# Altium PCB PCB_CONCENTRADOR.PcbDoc (part 1 of 3)
Units mm, origin at the board's own origin, x right, y up, seen from the top; angles counter-clockwise.
Board outline 90 x 100 mm, 2 copper layers (Top Layer, Bottom Layer); 69 components, 66 nets, 271 pads, 23 vias.
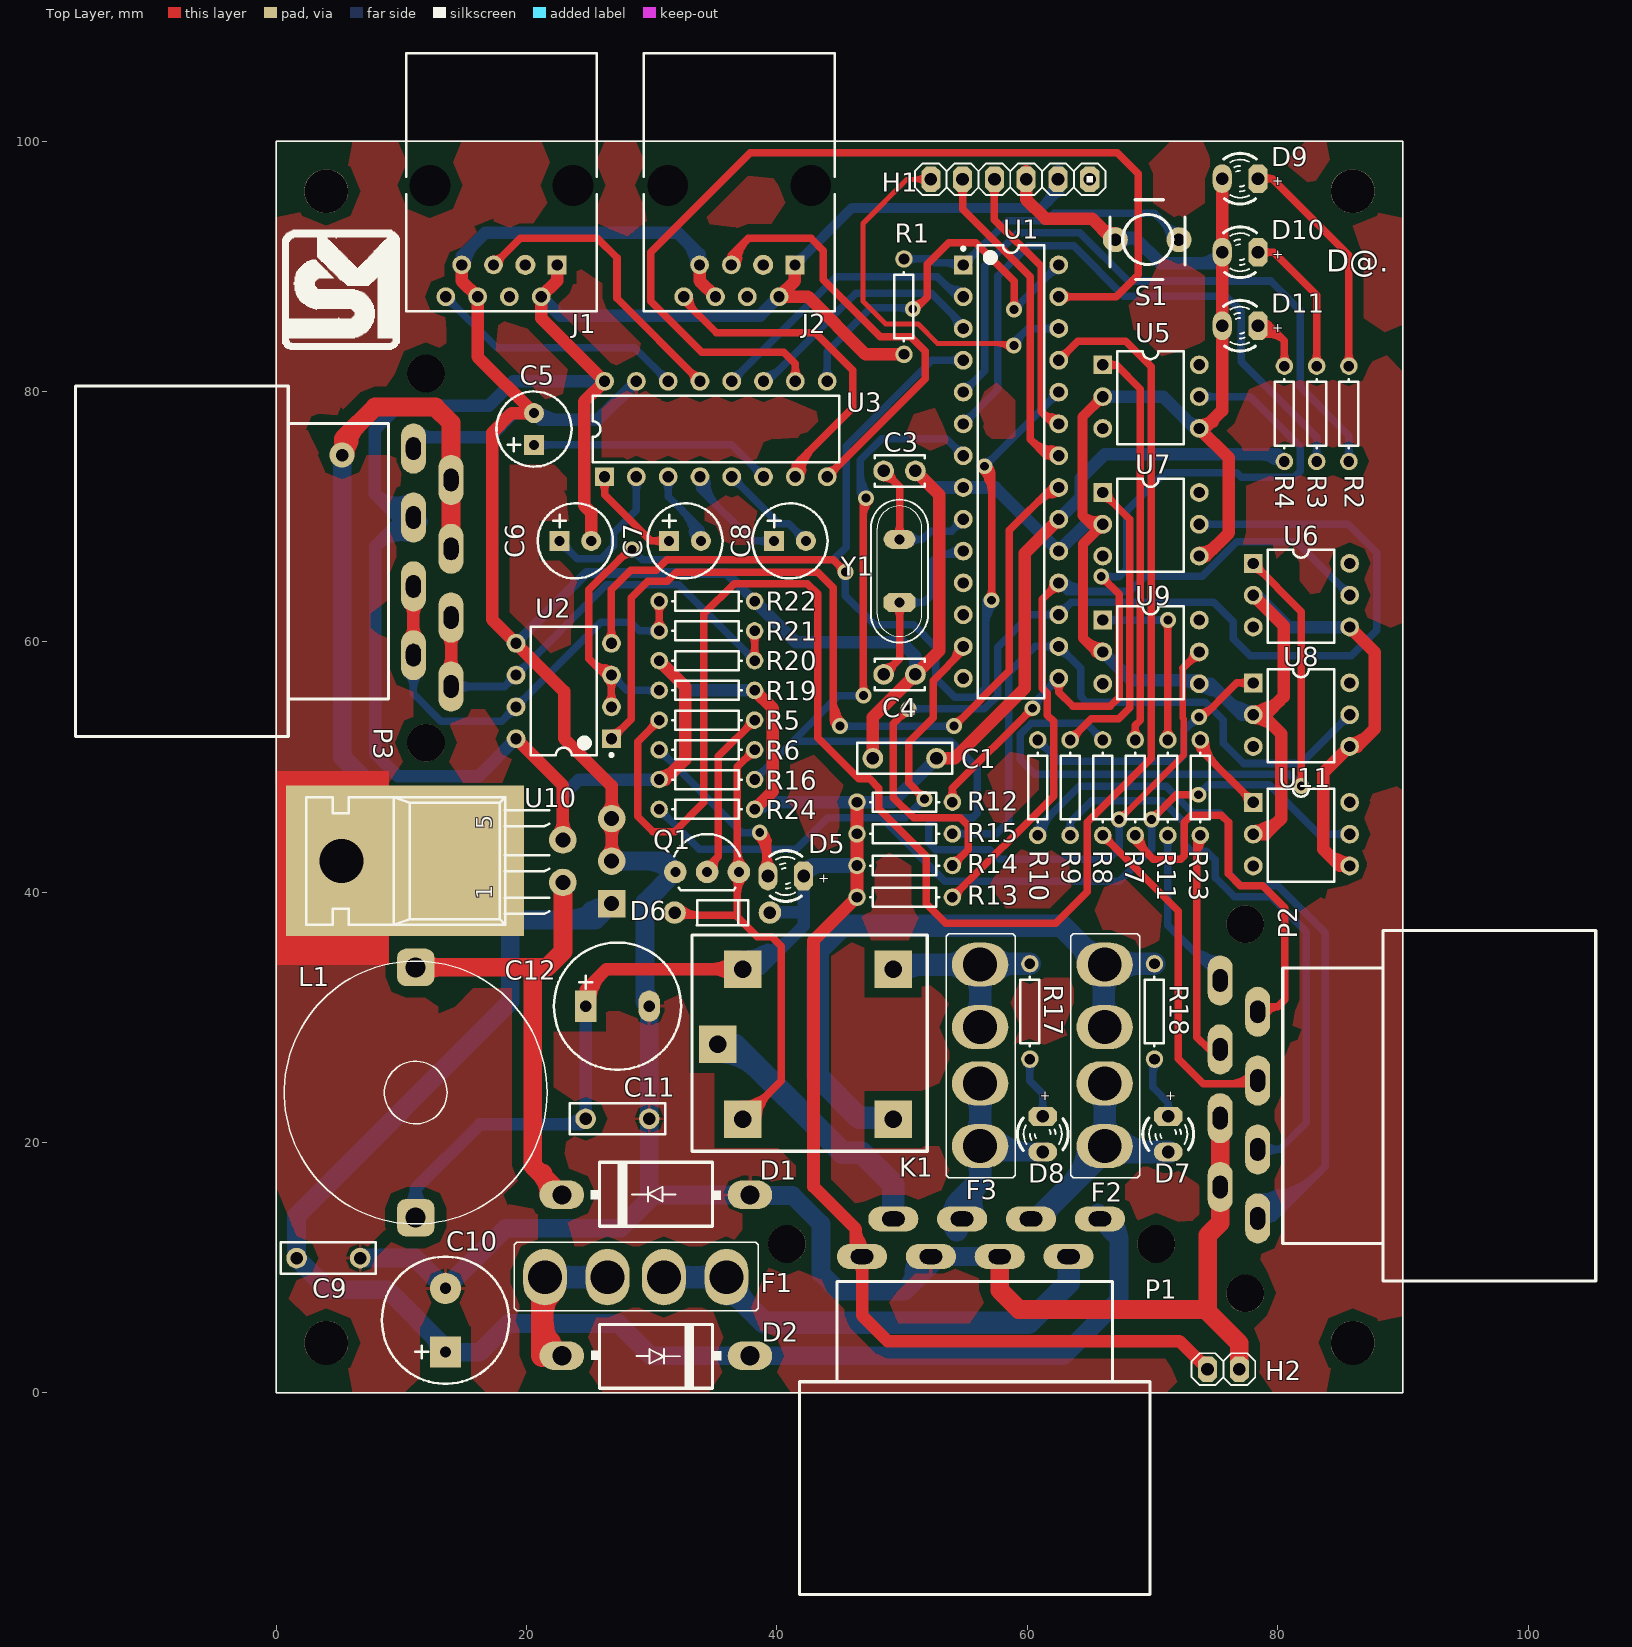
[diagram p0: Top Layer view]
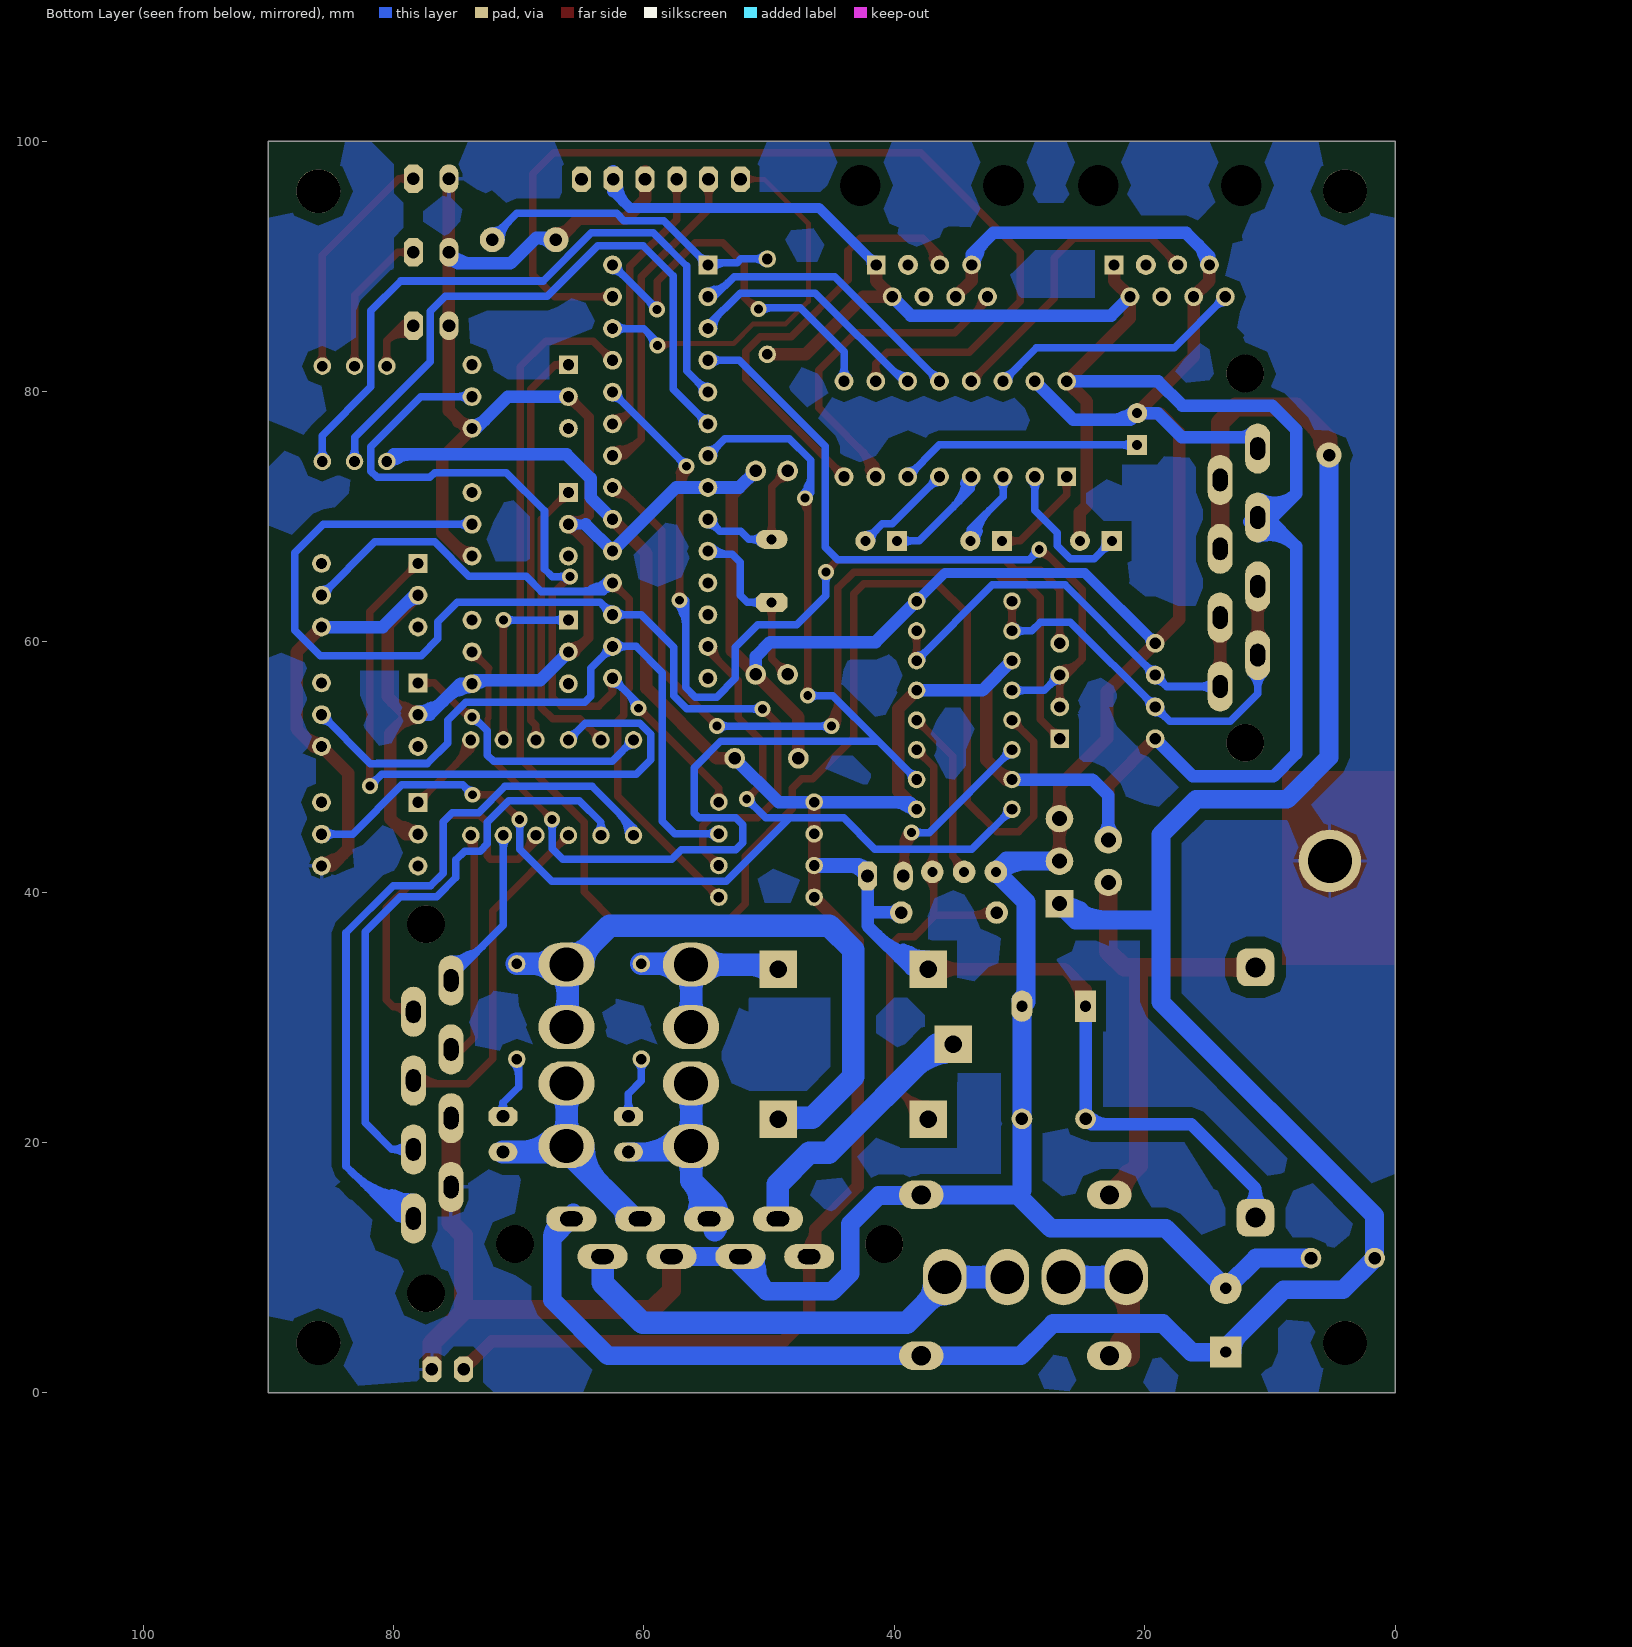
[diagram p1: Bottom Layer view, seen from below]

## Layer stack, top to bottom
Top Solder: solder mask 0.0102, Solder Resist, Dk 3.5
Top Layer: signal copper 0.0356
Dielectric 1: dielectric 0.32, FR-4, Dk 4.8
Bottom Layer: signal copper 0.0356
Bottom Solder: solder mask 0.0102, Solder Resist, Dk 3.5

## Board outline
0,0 0,100 90,100 90,0

## Design rules (kind name [scope] priority, off if disabled: settings)
Clearance "Poligono botton" [(InNamedPolygon('poligono gnd botton'))] p1: gap=0.8
Clearance "Pligono top" [(InNamedPolygon('poligono gnd top'))] p2: gap=0.8
Clearance [All] p3: gap=0.254
PolygonConnect [All] p1: connectstyle=Relief reliefconductorwidth=0.254 reliefentries=4 polygonreliefangle="90 Angle" airgapwidth=0.254
RoomDefinition concentrador [InComponentClass('concentrador')] p1: confinementstyle=ConfineIn formatcopy=TRUE lockcomponents=FALSE outline 0,0 90,0 90,100 0,100
RoutingVias [All] p1: holewidth=0.711 width=1.27 viastyle="Through Hole" minholewidth=0.711 minwidth=1.27 maxholewidth=0.711 maxwidth=1.27
SolderMaskExpansion [All] p1: expansion=0.102
Width "Schematic Width Constraint_10" [InNet('NetD2_1')] p1: maxlimit=2.5 minlimit=1.5 preferedwidth=1.8
Width "Schematic Width Constraint_9" [InNet('RELE1NO')] p2: maxlimit=2.5 minlimit=1.5 preferedwidth=1.8
Width "Schematic Width Constraint_8" [InNet('RELE1NC')] p3: maxlimit=2.5 minlimit=1.5 preferedwidth=1.8
Width "Schematic Width Constraint_7" [InNet('RELE1C')] p4: maxlimit=2.5 minlimit=1.5 preferedwidth=1.8
Width "Schematic Width Constraint_6" [InNet('NetD7_2')] p5: maxlimit=2.5 minlimit=1.5 preferedwidth=1.8
Width "Schematic Width Constraint_5" [InNet('NetD8_2')] p6: maxlimit=2.5 minlimit=1.5 preferedwidth=1.8
Width "Schematic Width Constraint_4" [InNet('GND')] p7: maxlimit=1.5 minlimit=0.8 preferedwidth=1
Width "Schematic Width Constraint_3" [InNet('5VCC')] p8: maxlimit=1.5 minlimit=0.8 preferedwidth=1
Width "Schematic Width Constraint_1" [InNet('NetD1_2')] p9: maxlimit=2.5 minlimit=1.5 preferedwidth=1.8
Width "Schematic Width Constraint" [InNet('24VCC')] p10: maxlimit=2.5 minlimit=1.5 preferedwidth=1.5
Width "Schematic Width Constraint_2" [InNet('24VCC_IN')] p11: maxlimit=2.5 minlimit=1.5 preferedwidth=1.8
Width [All] p12: maxlimit=0.8 minlimit=0.4 preferedwidth=0.6
30 further rules are at their usual default settings.

## Components (designator, comment, footprint, x,y, rotation, side; value= is the part's Value field where it differs from the comment)
C1 "VP44BY224JB" VP44-2.5 50.21,50.7 r180 top
C3 "VP31BA220JB" VP31-2.5 49.799,73.649 r0 top
C4 "VP31BA220JB" VP31-2.5 49.799,57.393 r0 top
C5 "Cap2" C1UF 20.599,75.73 r90 top
C6 "Cap2" C1UF 22.631,68.061 r0 top
C7 "Cap2" C1UF 31.394,68.061 r0 top
C8 "Cap2" C1UF 39.776,68.061 r0 top
C9 "VP44BY224JB" VP44-2.5 4.175,10.775 r0 top
C10 "Cap Pol1" C1000UF#1 13.525,3.275 r90 top
C11 "VP44BY224JB" VP44-2.5 27.265,21.9 r180 top
C12 "Cap Pol1" C1000UF#2 24.725,30.9 r0 top
D1 "Diodo" 1N4000 22.825,15.825 r0 top
D2 "Diodo" 1N4000 37.85,2.975 r180 top
D5 "LED0" "LED3MM green" 40.71,41.3 r0 top
D6 "Diode 1N4001" DIODE-0.3A 31.825,38.375 r0 top
D7 "LED0" "LED3MM green" 71.26,20.675 r90 top
D8 "LED0" "LED3MM green" 61.235,20.675 r90 top
D9 "LED0" "LED3MM green" 77,97 r0 top
D10 "LED0" "LED3MM green" 77,91.125 r0 top
D11 "LED0" "LED3MM green" 77,85.25 r0 top
F1 "Fuse" PORTA_FUSE 28.725,9.25 r0 top
F2 "Fuse" PORTA_FUSE 66.185,26.975 r270 top
F3 "Fuse" PORTA_FUSE 56.235,26.975 r270 top
H1 "Header 6" "Header 1X6" 57.375,96.95 r0 top
H2 "Header" "Header 1X2" 74.4,1.9 r0 top
J1 "RJ45" 15-43-6233 18,107 r180 top
J2 "RJ45" 15-43-6233 37,107 r180 top
K1 "Relay-SPDT" RELE 37.285,21.854 r0 top
L1 "Inductor Adj" Inductor_redondo 11.15,24 r270 top
P1 "MHDR1X8" 8PEQ_TAIYUE_OK 54.3,12.4 r0 top
P2 "MHDR1X8" 8PEQ_TAIYUE_OK 76.91,21.45 r90 top
P3 "MHDR1X8" 8PEQ_TAIYUE_OK 12.471,67.934 r270 top
Q1 "2N3904" 2N3904_OK 34.425,41.625 r90 top
R1 "Res1" AXIAL-0.3 50.15,86.775 r90 top
R2 "Res1" AXIAL-0.3 85.693,78.219 r90 top
R3 "Res1" AXIAL-0.3 83.117,78.219 r90 top
R4 "Res1" AXIAL-0.3 80.541,78.219 r90 top
R5 "Res1" AXIAL-0.3 34.41,53.75 r0 top
R6 "Res1" AXIAL-0.3 34.41,51.375 r180 top
R7 "Res1" AXIAL-0.3 68.628,48.355 r270 top
R8 "Res1" AXIAL-0.3 66.03,48.355 r270 top
R9 "Res1" AXIAL-0.3 63.431,48.355 r270 top
R10 "Res1" AXIAL-0.3 60.833,48.355 r270 top
R11 "Res1" AXIAL-0.3 71.227,48.355 r270 top
R12 "Res1" AXIAL-0.3 50.21,47.2 r0 top
R13 "Res1" AXIAL-0.3 50.21,39.6 r0 top
R14 "Res1" AXIAL-0.3 50.21,42.133 r0 top
R15 "Res1" AXIAL-0.3 50.21,44.667 r0 top
R16 "Res1" AXIAL-0.3 34.41,49 r0 top
R17 "Res1" AXIAL-0.3 60.21,30.475 r270 top
R18 "Res1" AXIAL-0.3 70.16,30.475 r270 top
R19 "Res1" AXIAL-0.3 34.41,56.125 r0 top
R20 "Res1" AXIAL-0.3 34.41,58.5 r0 top
R21 "Res1" AXIAL-0.3 34.41,60.875 r180 top
R22 "Res1" AXIAL-0.3 34.41,63.25 r0 top
R23 "Res1" AXIAL-0.3 73.825,48.355 r270 top
R24 "Res1" AXIAL-0.3 34.41,46.625 r180 top
S1 "Push Button" PULSA4 69.575,92.125 r0 top
U1 "PIC18F2550-I/SP" SPDIP300-SP28 58.7,73.6 r0 top
U2 "MAX485CPA" PA8 22.975,56.075 r180 top
U3 "MAX232N" N016 35.125,77 r0 top
U5 "4N33" 4n35_4n33_6pines 69.75,79.5 r270 top
U6 "4N33" 4n35_4n33_6pines 81.765,63.636 r270 top
U7 "4N33" 4n35_4n33_6pines 69.75,69.305 r270 top
U8 "4N33" 4n35_4n33_6pines 81.765,54.093 r270 top
U9 "4N33" 4n35_4n33_6pines 69.75,59.109 r270 top
U10 "LM2596T-5.0" FP_LM2596_D_PCB 5.21,42.5 r90 top
U11 "4N33" 4n35_4n33_6pines 81.765,44.55 r270 top
Y1 "XTAL" "Cristal mini" 49.799,65.648 r90 top

## Footprints (in the part's own frame and the unit in brackets; to place one, negate y for a bottom-side part, rotate by r counter-clockwise, add the part's x,y. Pads: shape width x height; smd on the part's side, far side on the other; paste and mask are expansions set on the pad)
1N4000 [mil] "Diodo Rectificador de proposito general"
  oval 140x90 hole 60: 1(591.54,0) 2(0,0)
  silkscreen extent 90,-98 500,102, body extent -27,-102 615,106, height 183
2N3904_OK [mm]
  round 1.8 hole 0.8: 1(0,2.54) 2(0,0) 3(0,-2.54)
  silkscreen extent -1.48,-2.61 3.02,2.61
4n35_4n33_6pines [mm] "optoacoplador"
  rect 1.5x1.5 hole 0.9: 1(-2.628,-3.717)
  round 1.5 hole 0.9: 2(-0.088,-3.717) 3(2.452,-3.717) 6(-2.628,3.988) 7(-0.088,3.988) 8(2.452,3.988)
  silkscreen extent -3.72,-2.55 3.7,2.75
8PEQ_TAIYUE_OK [mm]
  round 3 hole 3: 1(-13.5,-0.5) 1(16,-0.5)
  oval 4x2 hole 1.2 slot 1.8 at 0 deg: 1(-5,1.5) 2(0.5,1.5) 3(6,1.5) 4(11.5,1.5) 5(-7.5,-1.5) 6(-2,-1.5) 7(3.5,-1.5) 8(9,-1.5)
  silkscreen extent -12.5,-28.5 15.5,-3.5
15-43-6233 [mm] "Connector; PCB Jack, Thru-Hole; 1-Port; Unshielded without Lightpipes; Right Angle"
  rect 1.5x1.5 hole 0.9: 1(-4.445,16.89)
  round 1.5 hole 0.9: 2(-3.175,19.43) 4(-0.635,19.43) 5(0.635,16.89) 6(1.905,19.43) 7(3.175,16.89) 8(4.445,19.43)
  round 1.6 hole 0.9: 3(-1.905,16.89)
  round 2.95 hole 3.25 unplated: MH1(-5.715,10.54) MH2(5.715,10.54)
  silkscreen extent -7.62,0 7.62,20.58
AXIAL-0.3 [mm] "Axial Device, Thru-Hole; 2 Leads; 0.3 in Pin Spacing"
  round 1.4 hole 0.85: 1(-3.81,0) 2(3.81,0)
  silkscreen extent -2.77,-0.76 2.77,0.76
C1UF [mm]
  rect 1.6x1.6 hole 0.8: 1(0,0)
  round 1.6 hole 0.8: 2(2.54,0)
  silkscreen extent -1.73,-3 4.27,3
C1000UF#1 [mm]
  rect 2.5x2.5 hole 0.9: 1(0,0)
  round 2.5 hole 0.9: 2(5.08,0)
  silkscreen extent -2.54,-5.08 7.62,5.08
C1000UF#2 [mm]
  rect 1.7x2.5 hole 0.9: 1(0,0)
  oval 1.7x2.5 hole 0.9: 2(5.08,0)
  silkscreen extent -2.54,-5.08 7.62,5.08
"Cristal mini" [mm] "Cristal de cuarzo empaque pequeño"
  oct 1.524x2.54 hole 0.8: 1(-2.5,0)
  oval 1.524x2.54 hole 0.8: 2(2.54,0)
  silkscreen extent -5.71,-2.29 5.71,2.29, body extent -5.63,-2.35 5.72,2.3, height 3.5
DIODE-0.3A [mm]
  round 1.8 hole 1: 1(0,0) 2(7.62,0)
  silkscreen extent 1.79,-1 5.9,1
FP_LM2596_D_PCB [mm] "Fotprint LM2596 disipa calor en el PCB"
  round 5 hole 3.5: 0(0,0)
  rect 12x19 smd: 0(0.008,-5.089)
  rect 2.2x2.2 hole 1.2: 1(-3.416,-21.597)
  round 2.2 hole 1.2: 2(-1.716,-17.697) 3(-0.016,-21.597) 4(1.684,-17.697) 5(3.384,-21.597)
  silkscreen extent -5.08,-16.62 5.08,2.79
"Header 1X2" [mil] "Conector Header 1 linea 2 terminales"
  oct 60x80 hole 40: 1(0,0) 2(100,0)
  silkscreen extent -50,-50 150,50, body extent -50,-49 150,49, height 341
"Header 1X6" [mil] "Conector Header 1 linea 6 terminales"
  oct 60x80 hole 40: 1(-200,0) 2(-100,0) 3(0,0) 4(100,0) 5(200,0) 6(300,0)
  silkscreen extent -250,-50 350,50, body extent -250,-48 350,50, height 344
Inductor_redondo [mm]
  rrect50% 3x3 hole 1.6: 1(10,0) 2(-10,0)
  silkscreen extent -10.5,-10.5 10.5,10.5
"LED3MM green" [mil] "Led de 3mm Verde"
  oct 60x90.55 hole 40: 1(56.1,0)
  oval 60x90.55 hole 40: 2(-56.1,0)
  silkscreen extent -51,-80 51,80, body extent -65,-62 65,67, height 217
N016 [mm] "DIP; 16 Leads; Row Spacing 7.62 mm; Pitch 2.54 mm"
  rect 1.5x1.5 hole 0.9: 1(-8.89,-3.81)
  round 1.5 hole 0.9: 2(-6.35,-3.81) 3(-3.81,-3.81) 4(-1.27,-3.81) 5(1.27,-3.81) 6(3.81,-3.81) 7(6.35,-3.81) 8(8.89,-3.81) 9(8.89,3.81) 10(6.35,3.81) 11(3.81,3.81) 12(1.27,3.81) 13(-1.27,3.81) 14(-3.81,3.81) 15(-6.35,3.81) 16(-8.89,3.81)
  silkscreen extent -9.85,-2.65 9.85,2.65
PA8 [mm] "DIP, 8-Leads, Row Spacing 7.62mm, Pitch 2.54mm, Body 9.38x7.24mm"
  rect 1.5x1.5 hole 0.9: 1(-3.81,3.81)
  round 1.5 hole 0.9: 2(-3.81,1.27) 3(-3.81,-1.27) 4(-3.81,-3.81) 5(3.81,-3.81) 6(3.81,-1.27) 7(3.81,1.27) 8(3.81,3.81)
  silkscreen extent -3.94,-5.15 2.65,5.23, body extent -3.6,-5.15 3.6,5.15, height 4.58
PORTA_FUSE [mm]
  oval 3.5x4.5 hole 2.7: 1(-7.25,0) 1(-2.25,0) 2(2.25,0) 2(7.25,0)
  silkscreen extent -9.7,-2.7 9.8,2.8
PULSA4 [mm]
  round 2 hole 1: 1(-2.54,0) 2(2.54,0)
  silkscreen extent -2.97,-3.18 3.03,3.19
RELE [mm]
  rect 3x3 hole 1.4: 1(-2,6) 2(12,12) 3(12,0) 4(0,12) 5(0,0)
  silkscreen extent -4.06,-2.54 14.73,14.73
SPDIP300-SP28 [mm] "DIP, 28-Leads, Row Spacing 7.62mm, Pitch 2.54mm, Body 34.9x6.8mm"
  rect 1.5x1.5 hole 0.9: 1(-3.81,16.51)
  round 1.5 hole 0.9: 2(-3.81,13.97) 3(-3.81,11.43) 4(-3.81,8.89) 5(-3.81,6.35) 6(-3.81,3.81) 7(-3.81,1.27) 8(-3.81,-1.27) 9(-3.81,-3.81) 10(-3.81,-6.35) 11(-3.81,-8.89) 12(-3.81,-11.43) 13(-3.81,-13.97) 14(-3.81,-16.51) 15(3.81,-16.51) 16(3.81,-13.97) 17(3.81,-11.43) 18(3.81,-8.89) 19(3.81,-6.35) 20(3.81,-3.81) 21(3.81,-1.27) 22(3.81,1.27) 23(3.81,3.81) 24(3.81,6.35) 25(3.81,8.89) 26(3.81,11.43) 27(3.81,13.97) 28(3.81,16.51)
  silkscreen extent -3.93,-18.1 2.65,18.1, body extent -3.55,-18.1 3.55,18.1, height 5.08
VP31-2.5 [mm] "Capacitor, Ceramic, Thru-Hole, Dipped Radial; Body 4 x 2.5 mm (WxT) Pin Spacing 2.54 mm (typ)"
  round 1.65 hole 1: 1(-1.27,0) 2(1.27,0)
  silkscreen extent -2,-1.25 2,1.25
VP44-2.5 [mm] "Capacitor, Ceramic, Thru-Hole, Dipped Radial; Body 7.6 x 2.5 mm (WxT) Pin Spacing 5.08 mm (typ)"
  round 1.65 hole 1: 1(-2.54,0) 2(2.54,0)
  silkscreen extent -3.8,-1.25 3.8,1.25

## Part data
C1 C9 C11: "Dipped Radial Multilayer Ceramic Capacitor X7R: 220nF, 100V"
C3 C4: "Dipped Radial Multilayer Ceramic Capacitor COG (NPO): 22pF, 100V"
C5 C6 C7 C8: "Capacitor"
C10 C12: "Polarized Capacitor (Radial)"
D1 D2: "Diodo rectificador"
D5 D7 D8 D9 D10 D11: "Typical INFRARED GaAs LED"
D6: "1 Amp General Purpose Rectifier"
F1 F2 F3: library part "Fuse 1"
H1: "Header, 6-Pin"
H2: library part "Header 2", "Header 2 pin"
J1 J2: library part 15-43-6233, "Right Angle, Standard Profile, RJ45-Keyed, Flange Mount PCB Jack"
K1: "Single-Pole Dual-Throw Relay"
L1: "Adjustable Inductor"
P1 P2 P3: "Header, 8-Pin"
Q1: "NPN General Purpose Amplifier"
R1 R2 R3 R4 R5 R6 R7 R8 R9 R10 R11 R12 R13 R14 R15 R16 R17 R18 R19 R20 R21 R22 R23 R24: "Resistor"
S1: "Switch"
U1: "High Performance, Enhanced Flash, USB Microcontroller with nanoWatt Technology, 32K Flash, 28-Pin SPDIP, Industrial Temperature Range"
U2: "Low-Power, Slew-Rate-Limited RS-485/RS-422 Transceiver"
U3: "Dual EIA-232 Driver/Receiver"
U5 U6 U7 U8 U9 U11: library part ILD74, "Optocoupler, Phototransistor Output, Dual Channel, TTL Compatible, Pb-free"
U10: "SIMPLE SWITCHER Power Converter 150 KHz 3A Step-Down Voltage Regulator"
Y1: library part "Cristal de cuarzo", "Cristal de cuarzo"

## Free pads (board coordinates)
  round 3.5 hole 3.5: 0(4,4) 0(4,96) 0(86,4) 0(86,96)

## Via types
v1: diameter 1.27, hole 0.711, Top Layer to Bottom Layer, 22 vias
v2: diameter 2, hole 1, Top Layer to Bottom Layer, 1 vias

## Nets (pads, with @x,y where several pads share a name; then routed paths per layer and width w, separated by ;. In a path a pad name is that pad's centre, name@x,y a point inside that pad or via, vN(x,y) a via of type N, cw(c..) or ccw(c..) an arc to the next point about the centre after c; other vN are vias at no path point)
5VCC: C1.1 C6.2 C11.2 C12.1 D5.1 D6.2 H1.5 H2.1 J1.1 J1.2 J2.1 J2.2 K1.4 L1.1 P1.5 P3.6 R1.1 R4.1 R12.1 R13.1 R14.1 R15.1 R16.1 R19.2 R20.1 R24.1 U1.20 U2.8 U3.16 U10.4 | length 569.4
  Top Layer w1: U2.8@19.165,52.265 22.907,48.523 U10.4@22.907,44.184 ; J1.1@22.445,90.11 22.445,88.84 J1.2@21.175,87.57 21.175,85.87 U3.16@26.235,80.81 24.612,79.187 24.612,70.901 25.171,70.342 C6.2@25.171,68.061 ; C12.1@24.55,31.603 ccw(c23.55,33.334) 25.481,32.817 ; C12.1@24.725,30.9 24.725,32.208 26.371,33.854 K1.4@37.285,33.854 ; R16.1@30.6,49 31.075,49 32.675,50.6 32.675,56.425 R20.1@30.6,58.5 ; R24.1@38.22,46.625 39.674,48.079 39.674,54.671 R19.2@38.22,56.125 ; J2.1@41.445,90.11 41.445,88.84 J2.2@40.175,87.57 42.48,87.57 47.085,82.965 R1.1@50.15,82.965 ; R12.1@46.4,47.2 R15.1@46.4,44.667 R14.1@46.4,42.133 R13.1@46.4,39.6 42.925,36.125 42.925,16.475 46.303,13.097 ; C1.1@52.75,50.7 54.2,50.7 59.8,56.3 59.8,67.08 U1.20@62.51,69.79 ; H2.1@74.4,1.9 72.15,4.15 48.85,4.15 46.8,6.2 P1.5@46.8,10.9 46.303,10.9 46.303,13.097 ; U10.4@22.483,44.608 ccw(c21.458,45.633) 22.907,45.633 ; U10.4@22.483,44.608 ccw(c21.458,45.633) 22.907,45.633 ; U10.4@22.483,44.608 ccw(c21.458,45.633) 22.907,45.633 ; 22.907,45.633 ccw(c24.356,45.633) U10.4@23.331,44.608 ; 22.907,45.633 ccw(c24.356,45.633) U10.4@23.331,44.608 ; 22.907,45.633 ccw(c24.356,45.633) U10.4@23.331,44.608 ; R16.1@30.6,49.2 ccw(c30.6,50.83) 31.752,49.677 ; R16.1@30.6,49.2 ccw(c30.6,50.83) 31.752,49.677 ; R16.1@30.6,49.2 ccw(c30.6,50.83) 31.752,49.677 ; R16.1@30.773,48.9 cw(c31.763,48.329) 31.467,49.432 ; R16.1@30.773,48.9 cw(c31.763,48.329) 31.467,49.432 ; R16.1@30.773,48.9 cw(c31.763,48.329) 31.467,49.432 ; 34.871,33.854 ccw(c34.871,36.268) 36.578,34.561 cw(c34.871,36.268) 34.871,33.854 ; 34.871,33.854 cw(c34.871,31.44) 36.578,33.147 ccw(c34.871,31.44) 34.871,33.854 ; 46.303,13.096 ccw(c48.722,13.096) P1.5@47.129,11.276 ; 46.303,13.096 ccw(c48.722,13.096) P1.5@47.129,11.276 ; 46.303,13.096 ccw(c48.722,13.096) P1.5@47.129,11.276 ; P1.5@46.446,10.546 cw(c45.593,9.693) 46.8,9.693 ; P1.5@46.446,10.546 cw(c45.593,9.693) 46.8,9.693 ; P1.5@46.446,10.546 cw(c45.593,9.693) 46.8,9.693 ; P1.5@46.451,11.258 ccw(c45.959,11.76) 46.543,12.151 ; P1.5@46.451,11.258 ccw(c45.959,11.76) 46.543,12.151 ; P1.5@46.451,11.258 ccw(c45.959,11.76) 46.543,12.151 ; 46.8,9.693 cw(c48.007,9.693) P1.5@47.154,10.546 ; 46.8,9.693 cw(c48.007,9.693) P1.5@47.154,10.546 ; 46.8,9.693 cw(c48.007,9.693) P1.5@47.154,10.546 ; 73.519,2.781 ccw(c74.4,3.662) H2.1@74.4,2.416 ; 73.519,2.781 ccw(c74.4,3.662) H2.1@74.4,2.416 ; 73.519,2.781 ccw(c74.4,3.662) H2.1@74.4,2.416 ; C12.1@25.075,31.3 cw(c28.112,31.3) 25.965,33.447 ccw(c28.112,31.3) C12.1@25.075,31.3
  Bottom Layer w0.8: J2.1@41.445,90.11 46.01,94.675 61.134,94.675 H1.5@62.455,95.996 ; 61.879,95.626 ccw(c61.21,96.294) H1.5@62.111,96.585 ; J2.1@41.445,90.46 ccw(c41.445,91.305) J2.1@42.042,90.708 ; J2.1@41.445,90.46 ccw(c41.445,91.305) J2.1@42.042,90.708 ; J2.1@41.445,90.46 ccw(c41.445,91.305) J2.1@42.042,90.708 ; J2.1@41.795,90.11 cw(c42.64,90.11) J2.1@42.042,90.708 ; J2.1@41.795,90.11 cw(c42.64,90.11) J2.1@42.042,90.708 ; J2.1@41.795,90.11 cw(c42.64,90.11) J2.1@42.042,90.708 ; 61.342,94.883 ccw(c59.53,96.696) H1.5@62.093,96.696 ; 61.342,94.883 ccw(c59.53,96.696) H1.5@62.093,96.696 ; 61.342,94.883 ccw(c59.53,96.696) H1.5@62.093,96.696 ; 61.673,95.127 cw(c63.67,94.592) H1.5@62.636,96.382 ; 61.673,95.127 cw(c63.67,94.592) H1.5@62.636,96.382 ; 61.673,95.127 cw(c63.67,94.592) H1.5@62.636,96.382
  Bottom Layer w1: P3.6@10.971,68.675 P3.6@10.971,69.934 P3.6@10.209,69.934 ; L1.1@11.15,14 11.15,16.325 ; U2.8@19.165,52.265 16.15,49.25 9.725,49.25 7.9,51.075 7.9,67.625 P3.6@10.209,69.934 ; J1.2@21.175,87.57 22.68,86.065 38.67,86.065 J2.2@40.175,87.57 ; 22.854,21.45 ccw(c22.854,23.771) C11.2@24.495,22.13 ; U10.4@22.907,44.184 22.907,47.727 24.18,49 R16.1@30.6,49 ; C12.1@24.725,30.9 C11.2@24.725,21.9 24.275,21.45 16.275,21.45 11.15,16.325 ; U3.16@26.235,80.81 18.925,80.81 16.99,78.875 9.825,78.875 7.875,76.925 7.875,71.85 ; R20.1@30.6,58.5 32.975,56.125 R19.2@38.22,56.125 ; K1.4@37.989,34.565 ccw(c38.704,35.287) 38.968,34.305 ccw(c39.231,33.322) K1.4@38.25,33.59 ; R24.1@38.22,46.625 38.795,47.2 R12.1@46.4,47.2 49.25,47.2 C1.1@52.75,50.7 ; K1.4@38.679,33.854 42.135,37.31 42.135,38.4 ; 39.288,35.391 ccw(c40.141,32.205) K1.4@37.285,33.854 ; D6.2@39.445,38.375 39.47,38.4 42.135,38.4 ; D5.1@42.135,41.3 42.135,38.4 ; H1.5@62.455,95.996 H1.5@62.455,97.6 ; U1.20@62.51,69.79 64.261,71.541 64.261,73.06 66.176,74.975 79.975,74.975 R4.1@80.541,74.409 ; 7.875,71.85 ccw(c9.637,73.612) P3.6@10.748,71.382 ; 7.875,71.85 ccw(c9.637,73.612) P3.6@10.748,71.382 ; 7.875,71.85 ccw(c9.637,73.612) P3.6@10.748,71.382 ; 7.875,71.85 9.791,69.934 ; 7.9,67.625 cw(c10.106,65.419) P3.6@10.852,68.449 ; 7.9,67.625 cw(c10.106,65.419) P3.6@10.852,68.449 ; 7.9,67.625 cw(c10.106,65.419) P3.6@10.852,68.449 ; 8.858,70.867 ccw(c10.29,72.3) P3.6@11.194,70.486 ; 8.858,70.867 ccw(c10.29,72.3) P3.6@11.194,70.486 ; 8.858,70.867 ccw(c10.29,72.3) P3.6@11.194,70.486 ; 9.154,68.879 cw(c10.602,67.432) P3.6@11.09,69.42 ; 9.154,68.879 cw(c10.602,67.432) P3.6@11.09,69.42 ; 9.154,68.879 cw(c10.602,67.432) P3.6@11.09,69.42 ; 9.791,69.934 cw(c9.791,68.792) P3.6@10.612,69.586 ; 9.791,69.934 ccw(c9.791,71.076) P3.6@10.612,70.282 ; 9.791,69.934 ccw(c9.791,71.076) P3.6@10.612,70.282 ; 9.791,69.934 cw(c9.791,68.792) P3.6@10.612,69.586 ; 9.791,69.934 ccw(c9.791,71.076) P3.6@10.612,70.282 ; 9.791,69.934 cw(c9.791,68.792) P3.6@10.612,69.586 ; 9.791,69.934 P3.6@10.209,69.934 ; 9.84,69.885 ccw(c10.944,70.988) P3.6@11.64,69.591 ; 9.84,69.885 ccw(c10.944,70.988) P3.6@11.64,69.591 ; 9.84,69.885 ccw(c10.944,70.988) P3.6@11.64,69.591 ; P3.6@10.409,70.134 cw(c11.097,69.446) P3.6@11.329,70.391 ; P3.6@10.409,70.134 cw(c11.097,69.446) P3.6@11.329,70.391 ; P3.6@10.409,70.134 cw(c11.097,69.446) P3.6@11.329,70.391 ; 11.15,16.325 ccw(c13.352,16.325) 11.838,14.726 cw(c13.352,16.325) 11.15,16.325 ; 11.15,16.325 cw(c8.948,16.325) 10.462,14.726 ccw(c8.948,16.325) 11.15,16.325 ; U10.4@22.483,44.608 ccw(c21.458,45.633) 22.907,45.633 ; U10.4@22.483,44.608 ccw(c21.458,45.633) 22.907,45.633 ; U10.4@22.483,44.608 ccw(c21.458,45.633) 22.907,45.633 ; 22.907,45.633 ccw(c24.356,45.633) U10.4@23.331,44.608 ; 22.907,45.633 ccw(c24.356,45.633) U10.4@23.331,44.608 ; 22.907,45.633 ccw(c24.356,45.633) U10.4@23.331,44.608 ; K1.4@37.285,33.854 ccw(c37.285,37.219) 39.665,34.84 cw(c37.285,37.219) K1.4@37.285,33.854 ; R24.1@38.272,46.818 ccw(c38.567,47.922) 39.139,46.932 ; R24.1@38.272,46.818 ccw(c38.567,47.922) 39.139,46.932 ; R24.1@38.272,46.818 ccw(c38.567,47.922) 39.139,46.932 ; R24.1@38.361,46.484 cw(c40.091,44.754) 40.091,47.2 ; R24.1@38.361,46.484 cw(c40.091,44.754) 40.091,47.2 ; R24.1@38.361,46.484 cw(c40.091,44.754) 40.091,47.2 ; 78.693,74.975 cw(c78.693,72.561) R4.1@80.4,74.268 ; 78.693,74.975 cw(c78.693,72.561) R4.1@80.4,74.268 ; 78.693,74.975 cw(c78.693,72.561) R4.1@80.4,74.268 ; 79.622,74.717 ccw(c80.194,75.706) R4.1@80.489,74.603 ; 79.622,74.717 ccw(c80.194,75.706) R4.1@80.489,74.603 ; 79.622,74.717 ccw(c80.194,75.706) R4.1@80.489,74.603 ; K1.4@37.285,34.854 ccw(c37.285,40.633) 41.372,36.547 cw(c37.285,40.633) K1.4@37.285,34.854 ; D6.2@39.728,38.092 cw(c40.471,37.349) 40.471,38.4 ccw(c40.471,37.349) D6.2@39.728,38.092 ; D6.2@39.728,38.658 ccw(c40.35,39.28) 40.35,38.4 cw(c40.35,39.28) D6.2@39.728,38.658
  Bottom Layer w1.2: D5.1@42.135,41.3 42.968,42.133 ; R14.1@46.4,42.133 42.968,42.133 ; D5.1@42.153,41.849 ccw(c42.266,42.835) 42.968,42.133 ; D5.1@42.153,41.849 ccw(c42.266,42.835) 42.968,42.133 ; D5.1@42.153,41.849 ccw(c42.266,42.835) 42.968,42.133 ; D5.1@42.177,41.844 ccw(c42.416,42.738) D5.1@42.879,41.937 ; D5.1@42.177,41.844 ccw(c42.416,42.738) D5.1@42.879,41.937 ; D5.1@42.177,41.844 ccw(c42.416,42.738) D5.1@42.879,41.937 ; D5.1@42.25,41.573 cw(c43.601,40.222) 43.601,42.133 ; D5.1@42.25,41.573 cw(c43.601,40.222) 43.601,42.133 ; D5.1@42.25,41.573 cw(c43.601,40.222) 43.601,42.133 ; D5.1@42.289,41.638 cw(c42.968,41.42) 42.968,42.133 ; D5.1@42.289,41.638 cw(c42.968,41.42) 42.968,42.133 ; D5.1@42.289,41.638 cw(c42.968,41.42) 42.968,42.133
24VCC: C9.1 C10.1 D2.2 P1.4 P3.1@13.971,72.934 P3.2 U10.1 | length 245.8
  Top Layer w1.5: v2@5.36,74.84 5.36,76.21 7.9,78.75 12.725,78.75 13.971,77.504 P3.1@13.971,72.934 P3.2@13.971,67.434 ; v2@5.15,75.142 ccw(c4.436,76.378) 5.815,76.009 ; v2@5.15,75.142 ccw(c4.436,76.378) 5.815,76.009 ; v2@5.15,75.142 ccw(c4.436,76.378) 5.815,76.009 ; v2@5.525,74.925 cw(c9.026,74.925) 6.55,77.4 ; v2@5.525,74.925 cw(c9.026,74.925) 6.55,77.4 ; v2@5.525,74.925 cw(c9.026,74.925) 6.55,77.4
  Bottom Layer w1.5: v2(5.275,74.925) 5.275,50.775 8.625,47.425 15.875,47.425 18.707,44.593 18.707,37.791 ; C10.1@13.25,3.25 16.255,3.25 18.555,5.55 27.326,5.55 29.901,2.975 62.875,2.975 67.325,7.425 67.325,12.375 ; C10.1@13.525,3.275 13.525,3.625 8.9,8.25 4.16,8.25 C9.1@1.635,10.775 1.635,14.16 18.707,31.232 18.707,37.791 ; 25.682,38.746 ccw(c25.682,39.66) U10.1@26.496,39.244 ; U10.1@26.807,39.084 25.514,37.791 18.707,37.791 ; P1.4@65.8,13.9 67.325,12.375 ; 22.841,37.791 ccw(c22.841,43.05) U10.1@26.56,39.331 ; 22.841,37.791 ccw(c22.841,43.05) U10.1@26.56,39.331 ; 22.841,37.791 ccw(c22.841,43.05) U10.1@26.56,39.331 ; 25.199,38.546 cw(c26.199,36.815) U10.1@26.716,38.746 ; 25.199,38.546 cw(c26.199,36.815) U10.1@26.716,38.746 ; 25.199,38.546 cw(c26.199,36.815) U10.1@26.716,38.746 ; P1.4@66.623,13.723 cw(c64.929,12.029) 67.325,12.029 ; P1.4@66.623,13.723 cw(c64.929,12.029) 67.325,12.029 ; P1.4@66.623,13.723 cw(c64.929,12.029) 67.325,12.029 ; P1.4@66.644,13.705 cw(c65.509,12.287) 67.325,12.287 ; P1.4@66.644,13.705 cw(c65.509,12.287) 67.325,12.287 ; P1.4@66.644,13.705 cw(c65.509,12.287) 67.325,12.287 ; P1.4@67.032,13.807 ccw(c68.263,13.313) 67.325,12.375 ; P1.4@67.032,13.807 ccw(c68.263,13.313) 67.325,12.375 ; P1.4@67.032,13.807 ccw(c68.263,13.313) 67.325,12.375 ; P1.4@67.041,13.832 ccw(c68.367,13.459) 67.174,12.77 ; P1.4@67.041,13.832 ccw(c68.367,13.459) 67.174,12.77 ; P1.4@67.041,13.832 ccw(c68.367,13.459) 67.174,12.77 ; 12.424,4.726 cw(c10.973,3.275) 13.025,3.275 ccw(c10.973,3.275) 12.424,4.726 ; C10.1@13.879,3.629 ccw(c14.792,4.542) 14.792,3.25 cw(c14.792,4.542) C10.1@13.879,3.629 ; P1.4@65.64,14.366 ccw(c65.97,14.233) 65.719,13.981 cw(c65.97,14.233) P1.4@65.64,14.366
24VCC_IN: F1.2 P1.8 | length 68
  Top Layer w1.5: F1.2@35.975,9.25 F1.2@36.675,9.25
  Bottom Layer w1.8: F1.2@30.975,9.25 F1.2@36.675,9.25 ; F1.2@35.975,9.25 35.975,8.65 39.025,5.6 60.1,5.6 63.3,8.8 P1.8@63.3,10.9 ; F1.2@31.576,8.649 cw(c33.027,7.198) 33.027,9.25 ; F1.2@31.576,8.649 cw(c33.027,7.198) 33.027,9.25 ; F1.2@31.576,8.649 cw(c33.027,7.198) 33.027,9.25 ; F1.2@31.576,9.851 ccw(c33.027,11.302) 33.027,9.25 ; F1.2@31.576,9.851 ccw(c33.027,11.302) 33.027,9.25 ; F1.2@31.576,9.851 ccw(c33.027,11.302) 33.027,9.25 ; 33.923,9.25 cw(c33.923,7.198) F1.2@35.374,8.649 ; 33.923,9.25 ccw(c33.923,11.302) F1.2@35.374,9.851 ; 33.923,9.25 ccw(c33.923,11.302) F1.2@35.374,9.851 ; 33.923,9.25 cw(c33.923,7.198) F1.2@35.374,8.649 ; 33.923,9.25 ccw(c33.923,11.302) F1.2@35.374,9.851 ; 33.923,9.25 cw(c33.923,7.198) F1.2@35.374,8.649 ; F1.2@35.975,7.9 cw(c35.975,6.089) 37.255,7.37 ; F1.2@35.975,7.9 cw(c35.975,6.089) 37.255,7.37 ; F1.2@35.975,7.9 cw(c35.975,6.089) 37.255,7.37 ; F1.2@36.825,8.75 ccw(c39.119,8.75) 37.497,7.128 ; F1.2@36.825,8.75 ccw(c39.119,8.75) 37.497,7.128 ; F1.2@36.825,8.75 ccw(c39.119,8.75) 37.497,7.128
A: P3.3 P3.4 R20.2 R21.1 U2.6 | length 79.7
  Top Layer w0.6: R20.2@38.22,58.5 R21.1@38.22,60.875 ; R21.1@37.937,60.592 cw(c37.254,59.909) 38.22,59.909 ; R21.1@37.937,60.592 cw(c37.254,59.909) 38.22,59.909 ; R21.1@37.937,60.592 cw(c37.254,59.909) 38.22,59.909 ; 38.22,59.466 ccw(c39.186,59.466) 38.503,58.783 cw(c39.186,59.466) 38.22,59.466 ; 38.22,59.466 cw(c37.254,59.466) 37.937,58.783 ccw(c37.254,59.466) 38.22,59.466 ; 38.22,59.909 cw(c39.186,59.909) R21.1@38.503,60.592 ; 38.22,59.909 cw(c39.186,59.909) R21.1@38.503,60.592 ; 38.22,59.909 cw(c39.186,59.909) R21.1@38.503,60.592
  Top Layer w1: P3.4@13.971,56.434 P3.3@13.971,61.934 ; P3.4@13.617,57.788 ccw(c12.764,58.641) 13.971,58.641 ; P3.4@13.617,57.788 ccw(c12.764,58.641) 13.971,58.641 ; P3.4@13.617,57.788 ccw(c12.764,58.641) 13.971,58.641 ; P3.3@13.617,60.58 cw(c12.764,59.727) 13.971,59.727 ; P3.3@13.617,60.58 cw(c12.764,59.727) 13.971,59.727 ; P3.3@13.617,60.58 cw(c12.764,59.727) 13.971,59.727 ; 13.971,58.641 ccw(c15.178,58.641) P3.4@14.325,57.788 ; 13.971,58.641 ccw(c15.178,58.641) P3.4@14.325,57.788 ; 13.971,58.641 ccw(c15.178,58.641) P3.4@14.325,57.788 ; 13.971,59.727 cw(c15.178,59.727) P3.3@14.325,60.58 ; 13.971,59.727 cw(c15.178,59.727) P3.3@14.325,60.58 ; 13.971,59.727 cw(c15.178,59.727) P3.3@14.325,60.58
  Bottom Layer w0.6: P3.4@13.971,56.434 18.254,56.434 U2.6@19.165,57.345 26.366,64.546 32.174,64.546 R20.2@38.22,58.5 ; P3.4@14.466,55.939 cw(c15.661,54.744) 15.661,56.434 ; P3.4@14.466,55.939 cw(c15.661,54.744) 15.661,56.434 ; P3.4@14.466,55.939 cw(c15.661,54.744) 15.661,56.434 ; P3.4@14.466,56.929 ccw(c15.661,58.124) 15.661,56.434 ; P3.4@14.466,56.929 ccw(c15.661,58.124) 15.661,56.434 ; P3.4@14.466,56.929 ccw(c15.661,58.124) 15.661,56.434 ; 18.397,56.577 cw(c19.165,55.809) U2.6@19.165,56.895 ; 18.397,56.577 ccw(c17.629,57.345) U2.6@18.715,57.345 ; 18.397,56.577 ccw(c17.629,57.345) U2.6@18.715,57.345 ; 18.397,56.577 cw(c19.165,55.809) U2.6@19.165,56.895 ; 18.397,56.577 ccw(c17.629,57.345) U2.6@18.715,57.345 ; 18.397,56.577 cw(c19.165,55.809) U2.6@19.165,56.895 ; U2.6@19.165,57.795 ccw(c19.165,58.881) 19.933,58.113 ; U2.6@19.165,57.795 ccw(c19.165,58.881) 19.933,58.113 ; U2.6@19.165,57.795 ccw(c19.165,58.881) 19.933,58.113 ; U2.6@19.615,57.345 cw(c20.701,57.345) 19.933,58.113 ; U2.6@19.615,57.345 cw(c20.701,57.345) 19.933,58.113 ; U2.6@19.615,57.345 cw(c20.701,57.345) 19.933,58.113 ; 37.537,59.183 cw(c36.854,58.5) R20.2@37.82,58.5 ; 37.537,59.183 ccw(c38.22,59.866) R20.2@38.22,58.9 ; 37.537,59.183 ccw(c38.22,59.866) R20.2@38.22,58.9 ; 37.537,59.183 cw(c36.854,58.5) R20.2@37.82,58.5 ; 37.537,59.183 ccw(c38.22,59.866) R20.2@38.22,58.9 ; 37.537,59.183 cw(c36.854,58.5) R20.2@37.82,58.5
B: P3.7 P3.8 R21.2 R22.1 U2.7 | length 78.3
  Top Layer w0.6: R21.2@30.6,60.875 R22.1@30.6,63.25 ; R21.2@30.317,61.158 ccw(c29.634,61.841) 30.6,61.841 ; R21.2@30.317,61.158 ccw(c29.634,61.841) 30.6,61.841 ; R21.2@30.317,61.158 ccw(c29.634,61.841) 30.6,61.841 ; R22.1@30.317,62.967 cw(c29.634,62.284) 30.6,62.284 ; R22.1@30.317,62.967 cw(c29.634,62.284) 30.6,62.284 ; R22.1@30.317,62.967 cw(c29.634,62.284) 30.6,62.284 ; 30.6,61.841 ccw(c31.566,61.841) R21.2@30.883,61.158 ; 30.6,61.841 ccw(c31.566,61.841) R21.2@30.883,61.158 ; 30.6,61.841 ccw(c31.566,61.841) R21.2@30.883,61.158 ; 30.6,62.284 cw(c31.566,62.284) R22.1@30.883,62.967 ; 30.6,62.284 cw(c31.566,62.284) R22.1@30.883,62.967 ; 30.6,62.284 cw(c31.566,62.284) R22.1@30.883,62.967
  Top Layer w1: P3.8@10.971,58.934 P3.7@10.971,64.434 ; P3.8@10.617,60.288 ccw(c9.764,61.141) 10.971,61.141 ; P3.8@10.617,60.288 ccw(c9.764,61.141) 10.971,61.141 ; P3.8@10.617,60.288 ccw(c9.764,61.141) 10.971,61.141 ; P3.7@10.617,63.08 cw(c9.764,62.227) 10.971,62.227 ; P3.7@10.617,63.08 cw(c9.764,62.227) 10.971,62.227 ; P3.7@10.617,63.08 cw(c9.764,62.227) 10.971,62.227 ; 10.971,61.141 ccw(c12.178,61.141) P3.8@11.325,60.288 ; 10.971,61.141 ccw(c12.178,61.141) P3.8@11.325,60.288 ; 10.971,61.141 ccw(c12.178,61.141) P3.8@11.325,60.288 ; 10.971,62.227 cw(c12.178,62.227) P3.7@11.325,63.08 ; 10.971,62.227 cw(c12.178,62.227) P3.7@11.325,63.08 ; 10.971,62.227 cw(c12.178,62.227) P3.7@11.325,63.08
  Bottom Layer w0.6: P3.8@10.971,58.934 10.971,55.839 13.16,53.65 18.01,53.65 U2.7@19.165,54.805 25.935,61.575 28.324,61.575 29.024,60.875 R21.2@30.6,60.875 ; P3.8@10.476,57.439 cw(c9.281,56.244) 10.971,56.244 ; P3.8@10.476,57.439 cw(c9.281,56.244) 10.971,56.244 ; P3.8@10.476,57.439 cw(c9.281,56.244) 10.971,56.244 ; 10.971,56.244 cw(c12.661,56.244) P3.8@11.466,57.439 ; 10.971,56.244 cw(c12.661,56.244) P3.8@11.466,57.439 ; 10.971,56.244 cw(c12.661,56.244) P3.8@11.466,57.439 ; 18.397,54.037 cw(c19.165,53.269) U2.7@19.165,54.355 ; 18.397,54.037 ccw(c17.629,54.805) U2.7@18.715,54.805 ; 18.397,54.037 ccw(c17.629,54.805) U2.7@18.715,54.805 ; 18.397,54.037 cw(c19.165,53.269) U2.7@19.165,54.355 ; 18.397,54.037 ccw(c17.629,54.805) U2.7@18.715,54.805 ; 18.397,54.037 cw(c19.165,53.269) U2.7@19.165,54.355 ; U2.7@19.165,55.255 ccw(c19.165,56.341) 19.933,55.573 ; U2.7@19.165,55.255 ccw(c19.165,56.341) 19.933,55.573 ; U2.7@19.165,55.255 ccw(c19.165,56.341) 19.933,55.573 ; U2.7@19.615,54.805 cw(c20.701,54.805) 19.933,55.573 ; U2.7@19.615,54.805 cw(c20.701,54.805) 19.933,55.573 ; U2.7@19.615,54.805 cw(c20.701,54.805) 19.933,55.573 ; 29.634,60.875 cw(c29.634,59.909) R21.2@30.317,60.592 ; 29.634,60.875 ccw(c29.634,61.841) R21.2@30.317,61.158 ; 29.634,60.875 ccw(c29.634,61.841) R21.2@30.317,61.158 ; 29.634,60.875 cw(c29.634,59.909) R21.2@30.317,60.592 ; 29.634,60.875 ccw(c29.634,61.841) R21.2@30.317,61.158 ; 29.634,60.875 cw(c29.634,59.909) R21.2@30.317,60.592
BOTON_PANICO2: R16.2 U1.7 U9.7 | length 143.7
  Top Layer w0.5: v1(67.335,45.806) 72.491,50.962 72.491,53.832 ; 72.415,53.908 72.415,57.873 ; v1@67.335,46.191 ccw(c67.335,47.12) 67.992,46.463 ; v1@67.335,46.191 ccw(c67.335,47.12) 67.992,46.463 ; v1@67.335,46.191 ccw(c67.335,47.12) 67.992,46.463 ; v1@67.72,45.806 cw(c68.649,45.806) 67.992,46.463 ; v1@67.72,45.806 cw(c68.649,45.806) 67.992,46.463 ; v1@67.72,45.806 cw(c68.649,45.806) 67.992,46.463
  Top Layer w0.6: v1(46.917,55.711) 46.917,71.042 47.125,71.25 v1(47.125,71.475) ; 72.415,57.873 U9.7@73.738,59.197 ; v1@46.68,55.948 ccw(c46.108,56.52) 46.917,56.52 ; v1@46.68,55.948 ccw(c46.108,56.52) 46.917,56.52 ; v1@46.68,55.948 ccw(c46.108,56.52) 46.917,56.52 ; 46.917,56.52 ccw(c47.725,56.52) v1@47.153,55.948 ; 46.917,56.52 ccw(c47.725,56.52) v1@47.153,55.948 ; 46.917,56.52 ccw(c47.725,56.52) v1@47.153,55.948 ; 46.917,70.163 cw(c48.437,70.163) v1@47.362,71.238 ; 46.917,70.163 cw(c48.437,70.163) v1@47.362,71.238 ; 46.917,70.163 cw(c48.437,70.163) v1@47.362,71.238 ; v1@46.945,71.192 cw(c46.757,70.895) 47.062,70.718 ; v1@46.945,71.192 cw(c46.757,70.895) 47.062,70.718 ; v1@46.945,71.192 cw(c46.757,70.895) 47.062,70.718 ; 72.97,58.429 cw(c73.738,57.661) U9.7@73.738,58.747 ; 72.97,58.429 ccw(c72.202,59.197) U9.7@73.288,59.197 ; 72.97,58.429 ccw(c72.202,59.197) U9.7@73.288,59.197 ; 72.97,58.429 cw(c73.738,57.661) U9.7@73.738,58.747 ; 72.97,58.429 ccw(c72.202,59.197) U9.7@73.288,59.197 ; 72.97,58.429 cw(c73.738,57.661) U9.7@73.738,58.747
  Bottom Layer w0.6: R16.2@38.22,49 41.3,52.08 ; v1(46.917,55.711) 44.906,55.686 41.3,52.08 ; v1(47.125,71.475) 46.675,71.925 46.675,74.525 48.375,76.225 53.535,76.225 U1.7@54.89,74.87 ; v1(67.335,45.806) 67.335,43.485 66.475,42.625 57.79,42.625 57.022,43.393 52.682,43.393 52.125,43.95 52.125,45.375 52.683,45.933 55.633,45.933 56,46.3 56,49.95 53.87,52.08 41.3,52.08 ; R16.2@38.22,49.4 ccw(c38.22,50.366) 38.903,49.683 ; R16.2@38.22,49.4 ccw(c38.22,50.366) 38.903,49.683 ; R16.2@38.22,49.4 ccw(c38.22,50.366) 38.903,49.683 ; R16.2@38.62,49 cw(c39.586,49) 38.903,49.683 ; R16.2@38.62,49 cw(c39.586,49) 38.903,49.683 ; R16.2@38.62,49 cw(c39.586,49) 38.903,49.683 ; 46.108,55.701 cw(c46.118,54.893) v1@46.683,55.472 ; 46.108,55.701 ccw(c46.098,56.51) v1@46.677,55.945 ; 46.108,55.701 ccw(c46.098,56.51) v1@46.677,55.945 ; 46.108,55.701 cw(c46.118,54.893) v1@46.683,55.472 ; 46.108,55.701 ccw(c46.098,56.51) v1@46.677,55.945 ; 46.108,55.701 cw(c46.118,54.893) v1@46.683,55.472 ; 46.675,73.37 ccw(c49.02,73.37) v1@47.362,71.712 ; 46.675,73.37 ccw(c49.02,73.37) v1@47.362,71.712 ; 46.675,73.37 ccw(c49.02,73.37) v1@47.362,71.712 ; v1@46.838,71.649 ccw(c46.038,72.133) 46.848,72.601 ; v1@46.838,71.649 ccw(c46.038,72.133) 46.848,72.601 ; v1@46.838,71.649 ccw(c46.038,72.133) 46.848,72.601 ; 54.122,75.638 cw(c53.354,74.87) U1.7@54.44,74.87 ; 54.122,75.638 ccw(c54.89,76.406) U1.7@54.89,75.32 ; 54.122,75.638 ccw(c54.89,76.406) U1.7@54.89,75.32 ; 54.122,75.638 cw(c53.354,74.87) U1.7@54.44,74.87 ; 54.122,75.638 ccw(c54.89,76.406) U1.7@54.89,75.32 ; 54.122,75.638 cw(c53.354,74.87) U1.7@54.44,74.87 ; v1@67.098,45.569 cw(c66.526,44.997) 67.335,44.997 ; v1@67.098,45.569 cw(c66.526,44.997) 67.335,44.997 ; v1@67.098,45.569 cw(c66.526,44.997) 67.335,44.997 ; 67.335,44.997 cw(c68.143,44.997) v1@67.571,45.569 ; 67.335,44.997 cw(c68.143,44.997) v1@67.571,45.569 ; 67.335,44.997 cw(c68.143,44.997) v1@67.571,45.569
DE1_485: R19.1 U1.4 U2.2 U2.3 | length 97.2
  Top Layer w0.6: U2.2@26.785,54.805 U2.3@26.785,57.345 26.28,57.345 24.975,58.65 24.975,64.15 v1@28,67.175 ; 25.155,58.47 ccw(c26.785,60.101) U2.3@26.785,57.795 ; 25.155,58.47 ccw(c26.785,60.101) U2.3@26.785,57.795 ; 25.155,58.47 ccw(c26.785,60.101) U2.3@26.785,57.795 ; 26.256,57.937 cw(c25.98,56.907) U2.3@26.917,57.417 ; 26.256,57.937 cw(c25.98,56.907) U2.3@26.917,57.417 ; 26.256,57.937 cw(c25.98,56.907) U2.3@26.917,57.417 ; U2.2@26.467,55.123 ccw(c25.699,55.891) 26.785,55.891 ; U2.2@26.467,55.123 ccw(c25.699,55.891) 26.785,55.891 ; U2.2@26.467,55.123 ccw(c25.699,55.891) 26.785,55.891 ; U2.3@26.467,57.027 cw(c25.699,56.259) 26.785,56.259 ; U2.3@26.467,57.027 cw(c25.699,56.259) 26.785,56.259 ; U2.3@26.467,57.027 cw(c25.699,56.259) 26.785,56.259 ; 26.785,55.891 ccw(c27.871,55.891) U2.2@27.103,55.123 ; 26.785,55.891 ccw(c27.871,55.891) U2.2@27.103,55.123 ; 26.785,55.891 ccw(c27.871,55.891) U2.2@27.103,55.123 ; 26.785,56.259 cw(c27.871,56.259) U2.3@27.103,57.027 ; 26.785,56.259 cw(c27.871,56.259) U2.3@27.103,57.027 ; 26.785,56.259 cw(c27.871,56.259) U2.3@27.103,57.027 ; 27.456,66.631 cw(c28.425,65.661) v1@28.425,67.032 ; 27.456,66.631 cw(c28.425,65.661) v1@28.425,67.032 ; 27.456,66.631 cw(c28.425,65.661) v1@28.425,67.032
  Bottom Layer w0.6: U2.3@26.785,57.345 28.005,56.125 R19.1@30.6,56.125 ; v1(28.425,67.367) 29.242,66.55 44.518,66.55 45.525,67.557 45.525,75.625 52.39,82.49 U1.4@54.89,82.49 ; U2.3@26.785,56.895 cw(c26.785,55.809) 27.553,56.577 ; U2.3@26.785,56.895 cw(c26.785,55.809) 27.553,56.577 ; U2.3@26.785,56.895 cw(c26.785,55.809) 27.553,56.577 ; U2.3@27.235,57.345 ccw(c28.321,57.345) 27.553,56.577 ; U2.3@27.235,57.345 ccw(c28.321,57.345) 27.553,56.577 ; U2.3@27.235,57.345 ccw(c28.321,57.345) 27.553,56.577 ; v1@28.425,67.032 cw(c28.425,66.223) 28.997,66.795 ; v1@28.425,67.032 cw(c28.425,66.223) 28.997,66.795 ; v1@28.425,67.032 cw(c28.425,66.223) 28.997,66.795 ; v1@28.76,67.367 ccw(c29.569,67.367) 28.997,66.795 ; v1@28.76,67.367 ccw(c29.569,67.367) 28.997,66.795 ; v1@28.76,67.367 ccw(c29.569,67.367) 28.997,66.795 ; 29.634,56.125 cw(c29.634,55.159) R19.1@30.317,55.842 ; 29.634,56.125 ccw(c29.634,57.091) R19.1@30.317,56.408 ; 29.634,56.125 ccw(c29.634,57.091) R19.1@30.317,56.408 ; 29.634,56.125 cw(c29.634,55.159) R19.1@30.317,55.842 ; 29.634,56.125 ccw(c29.634,57.091) R19.1@30.317,56.408 ; 29.634,56.125 cw(c29.634,55.159) R19.1@30.317,55.842 ; 53.804,82.49 cw(c53.804,81.404) U1.4@54.572,82.172 ; 53.804,82.49 ccw(c53.804,83.576) U1.4@54.572,82.808 ; 53.804,82.49 ccw(c53.804,83.576) U1.4@54.572,82.808 ; 53.804,82.49 cw(c53.804,81.404) U1.4@54.572,82.172 ; 53.804,82.49 ccw(c53.804,83.576) U1.4@54.572,82.808 ; 53.804,82.49 cw(c53.804,81.404) U1.4@54.572,82.172
DI1_485: U1.24 U2.4 | length 125.4
  Top Layer w0.6: U2.4@26.785,59.885 26.785,64.17 28.319,65.704 30.354,65.704 31.2,66.55 44.508,66.55 v1(45.465,65.592) ; v1(56.59,74.03) 57.15,73.471 ; v1(57.15,63.325) 56.863,63.325 57.15,63.038 57.15,73.471 ; U2.4@26.467,60.203 ccw(c25.699,60.971) 26.785,60.971 ; U2.4@26.467,60.203 ccw(c25.699,60.971) 26.785,60.971 ; U2.4@26.467,60.203 ccw(c25.699,60.971) 26.785,60.971 ; 26.785,60.971 ccw(c27.871,60.971) U2.4@27.103,60.203 ; 26.785,60.971 ccw(c27.871,60.971) U2.4@27.103,60.203 ; 26.785,60.971 ccw(c27.871,60.971) U2.4@27.103,60.203 ; 44.893,66.164 cw(c44.321,65.592) v1@45.13,65.592 ; 44.893,66.164 ccw(c45.465,66.736) v1@45.465,65.927 ; 44.893,66.164 ccw(c45.465,66.736) v1@45.465,65.927 ; 44.893,66.164 cw(c44.321,65.592) v1@45.13,65.592 ; 44.893,66.164 ccw(c45.465,66.736) v1@45.465,65.927 ; 44.893,66.164 cw(c44.321,65.592) v1@45.13,65.592 ; v1@56.354,73.794 cw(c54.431,71.871) 57.15,71.871 ; v1@56.354,73.794 cw(c54.431,71.871) 57.15,71.871 ; v1@56.354,73.794 cw(c54.431,71.871) 57.15,71.871 ; v1@56.596,73.695 cw(c56.608,72.928) 57.15,73.471 ; v1@56.596,73.695 cw(c56.608,72.928) 57.15,73.471 ; v1@56.596,73.695 cw(c56.608,72.928) 57.15,73.471 ; v1@56.691,73.711 cw(c56.817,73.31) 57.181,73.52 ; v1@56.691,73.711 cw(c56.817,73.31) 57.181,73.52 ; v1@56.691,73.711 cw(c56.817,73.31) 57.181,73.52 ; v1@56.778,74.218 cw(c55.879,73.319) 57.15,73.319 ; v1@56.778,74.218 cw(c55.879,73.319) 57.15,73.319 ; v1@56.778,74.218 cw(c55.879,73.319) 57.15,73.319 ; v1@56.898,73.897 ccw(c58.083,73.382) 56.964,72.736 ; v1@56.898,73.897 ccw(c58.083,73.382) 56.964,72.736 ; v1@56.898,73.897 ccw(c58.083,73.382) 56.964,72.736 ; v1@56.913,63.562 ccw(c56.341,64.134) 57.15,64.134 ; v1@56.913,63.562 ccw(c56.341,64.134) 57.15,64.134 ; v1@56.913,63.562 ccw(c56.341,64.134) 57.15,64.134 ; v1@56.925,74.025 ccw(c57.692,74.013) 57.15,73.471 ; v1@56.925,74.025 ccw(c57.692,74.013) 57.15,73.471 ; v1@56.925,74.025 ccw(c57.692,74.013) 57.15,73.471 ; 57.15,64.134 ccw(c57.959,64.134) v1@57.387,63.562 ; 57.15,64.134 ccw(c57.959,64.134) v1@57.387,63.562 ; 57.15,64.134 ccw(c57.959,64.134) v1@57.387,63.562
  Bottom Layer w0.6: v1(45.465,65.592) 45.465,63.685 47.8,61.35 50.925,61.35 52.7,59.575 52.7,57.075 54.2,55.575 55.895,55.575 56.675,56.355 56.675,63.325 v1(57.15,63.325) ; v1(56.59,74.03) U1.24@62.51,79.95 ; v1@45.228,65.356 cw(c44.656,64.784) 45.465,64.784 ; v1@45.228,65.356 cw(c44.656,64.784) 45.465,64.784 ; v1@45.228,65.356 cw(c44.656,64.784) 45.465,64.784 ; 45.465,64.784 cw(c46.274,64.784) v1@45.702,65.356 ; 45.465,64.784 cw(c46.274,64.784) v1@45.702,65.356 ; 45.465,64.784 cw(c46.274,64.784) v1@45.702,65.356 ; v1@56.59,74.365 ccw(c56.59,75.174) 57.162,74.602 ; v1@56.59,74.365 ccw(c56.59,75.174) 57.162,74.602 ; v1@56.59,74.365 ccw(c56.59,75.174) 57.162,74.602 ; 56.675,61.369 cw(c59.106,61.369) v1@57.387,63.088 ; 56.675,61.369 cw(c59.106,61.369) v1@57.387,63.088 ; 56.675,61.369 cw(c59.106,61.369) v1@57.387,63.088 ; 56.675,62.818 cw(c57.657,62.818) v1@56.963,63.512 ; 56.675,62.818 cw(c57.657,62.818) v1@56.963,63.512 ; 56.675,62.818 cw(c57.657,62.818) v1@56.963,63.512 ; 56.851,62.16 ccw(c55.975,62.667) v1@56.858,63.161 ; 56.851,62.16 ccw(c55.975,62.667) v1@56.858,63.161 ; 56.851,62.16 ccw(c55.975,62.667) v1@56.858,63.161 ; v1@56.925,74.03 cw(c57.734,74.03) 57.162,74.602 ; v1@56.925,74.03 cw(c57.734,74.03) 57.162,74.602 ; v1@56.925,74.03 cw(c57.734,74.03) 57.162,74.602 ; 61.742,79.182 cw(c62.51,78.414) U1.24@62.51,79.5 ; 61.742,79.182 ccw(c60.974,79.95) U1.24@62.06,79.95 ; 61.742,79.182 ccw(c60.974,79.95) U1.24@62.06,79.95 ; 61.742,79.182 cw(c62.51,78.414) U1.24@62.51,79.5 ; 61.742,79.182 ccw(c60.974,79.95) U1.24@62.06,79.95 ; 61.742,79.182 cw(c62.51,78.414) U1.24@62.51,79.5
EN_BT: H1.6